# Altium PCB PCB2.PcbDoc (part 1 of 2)
Units mil, origin at the board's own origin, x right, y up, seen from the top; angles counter-clockwise.
Board outline 3889 x 3936 mil, 2 copper layers (Top Layer, Bottom Layer); 71 components, 78 nets, 442 pads, 93 vias.
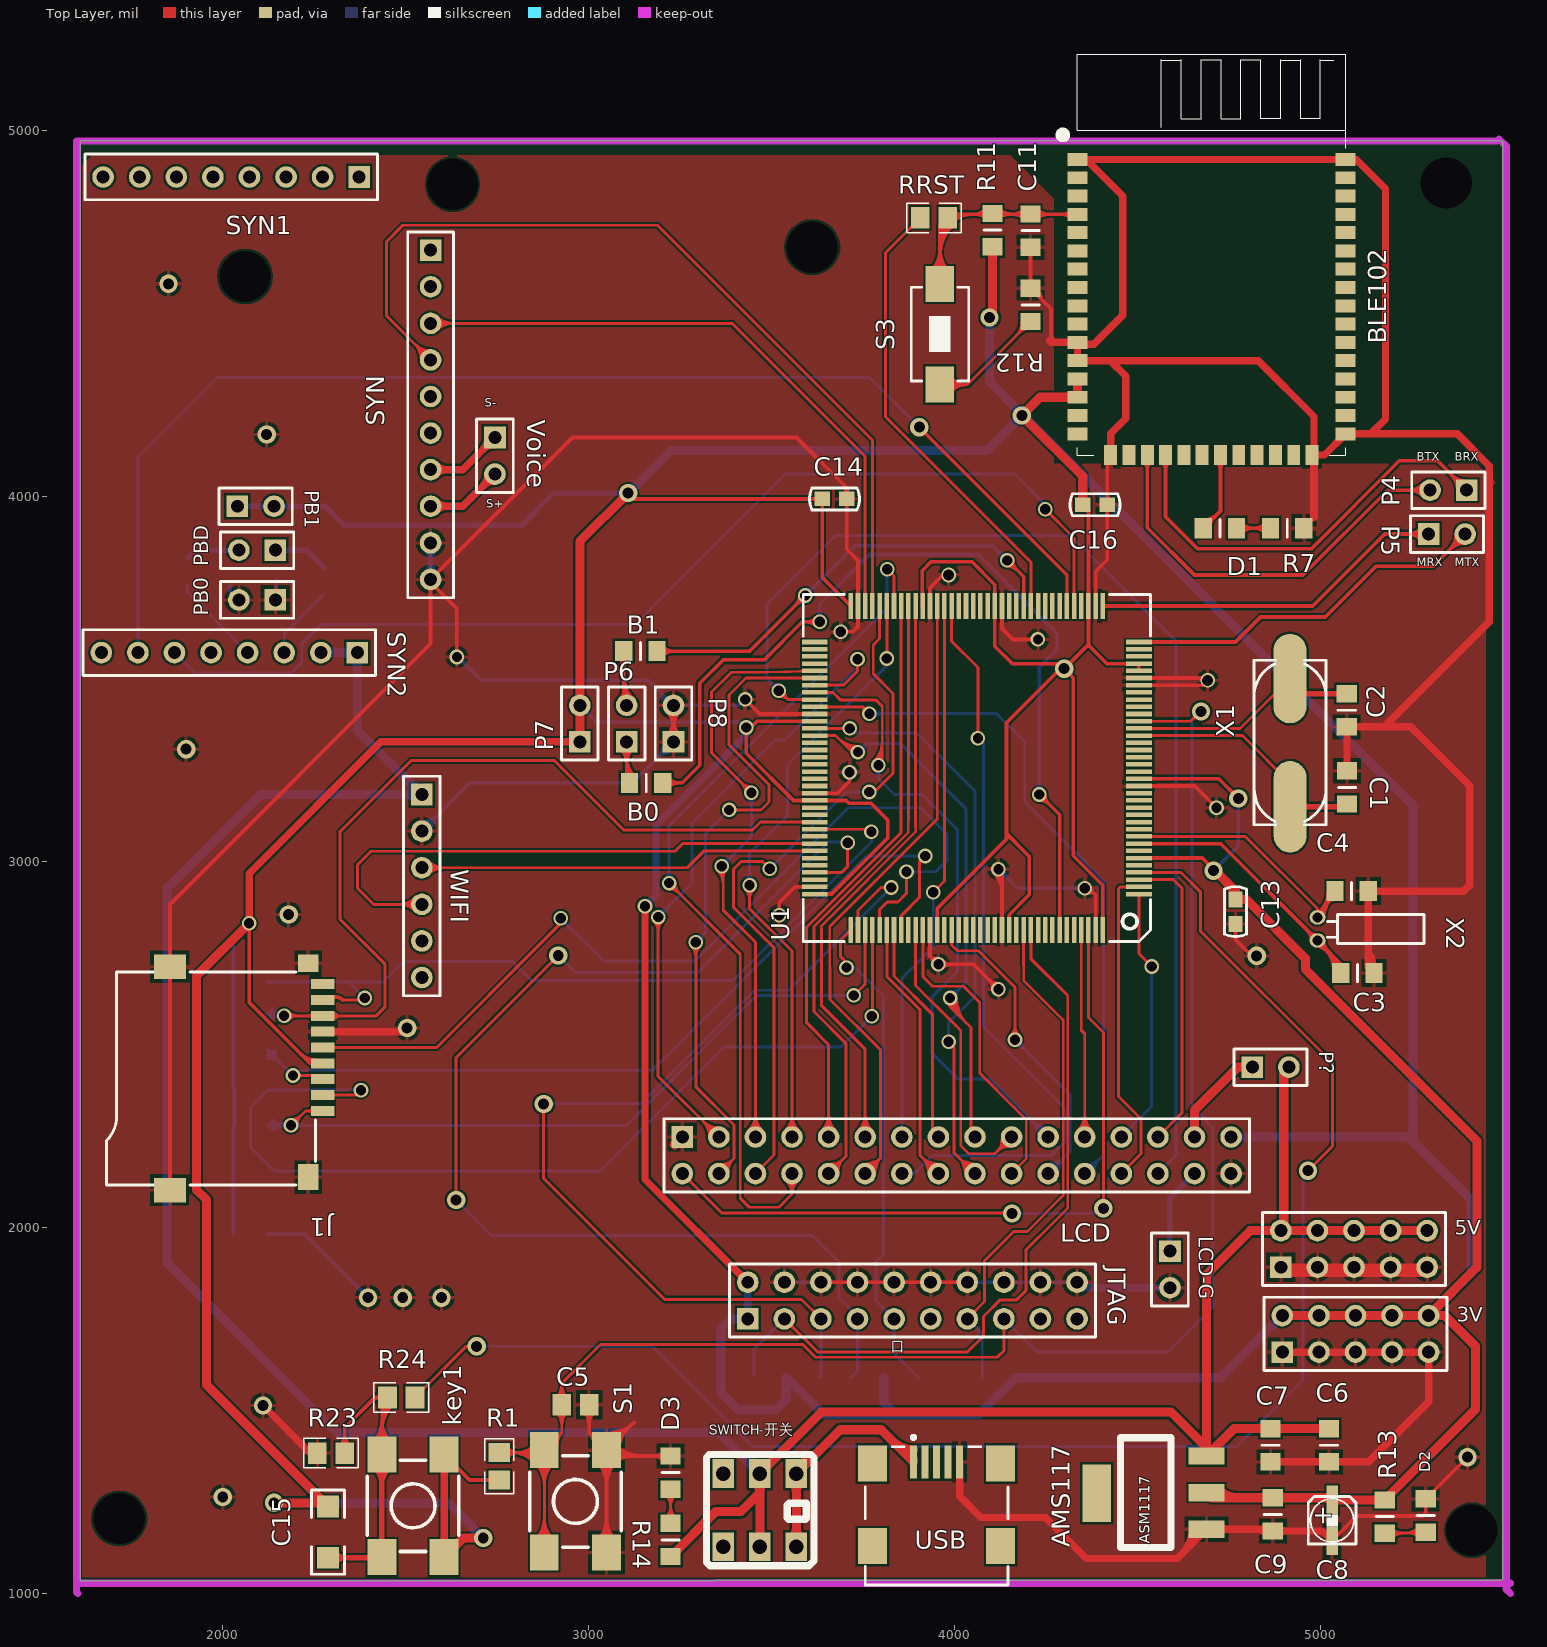
[diagram p0: Top Layer view]
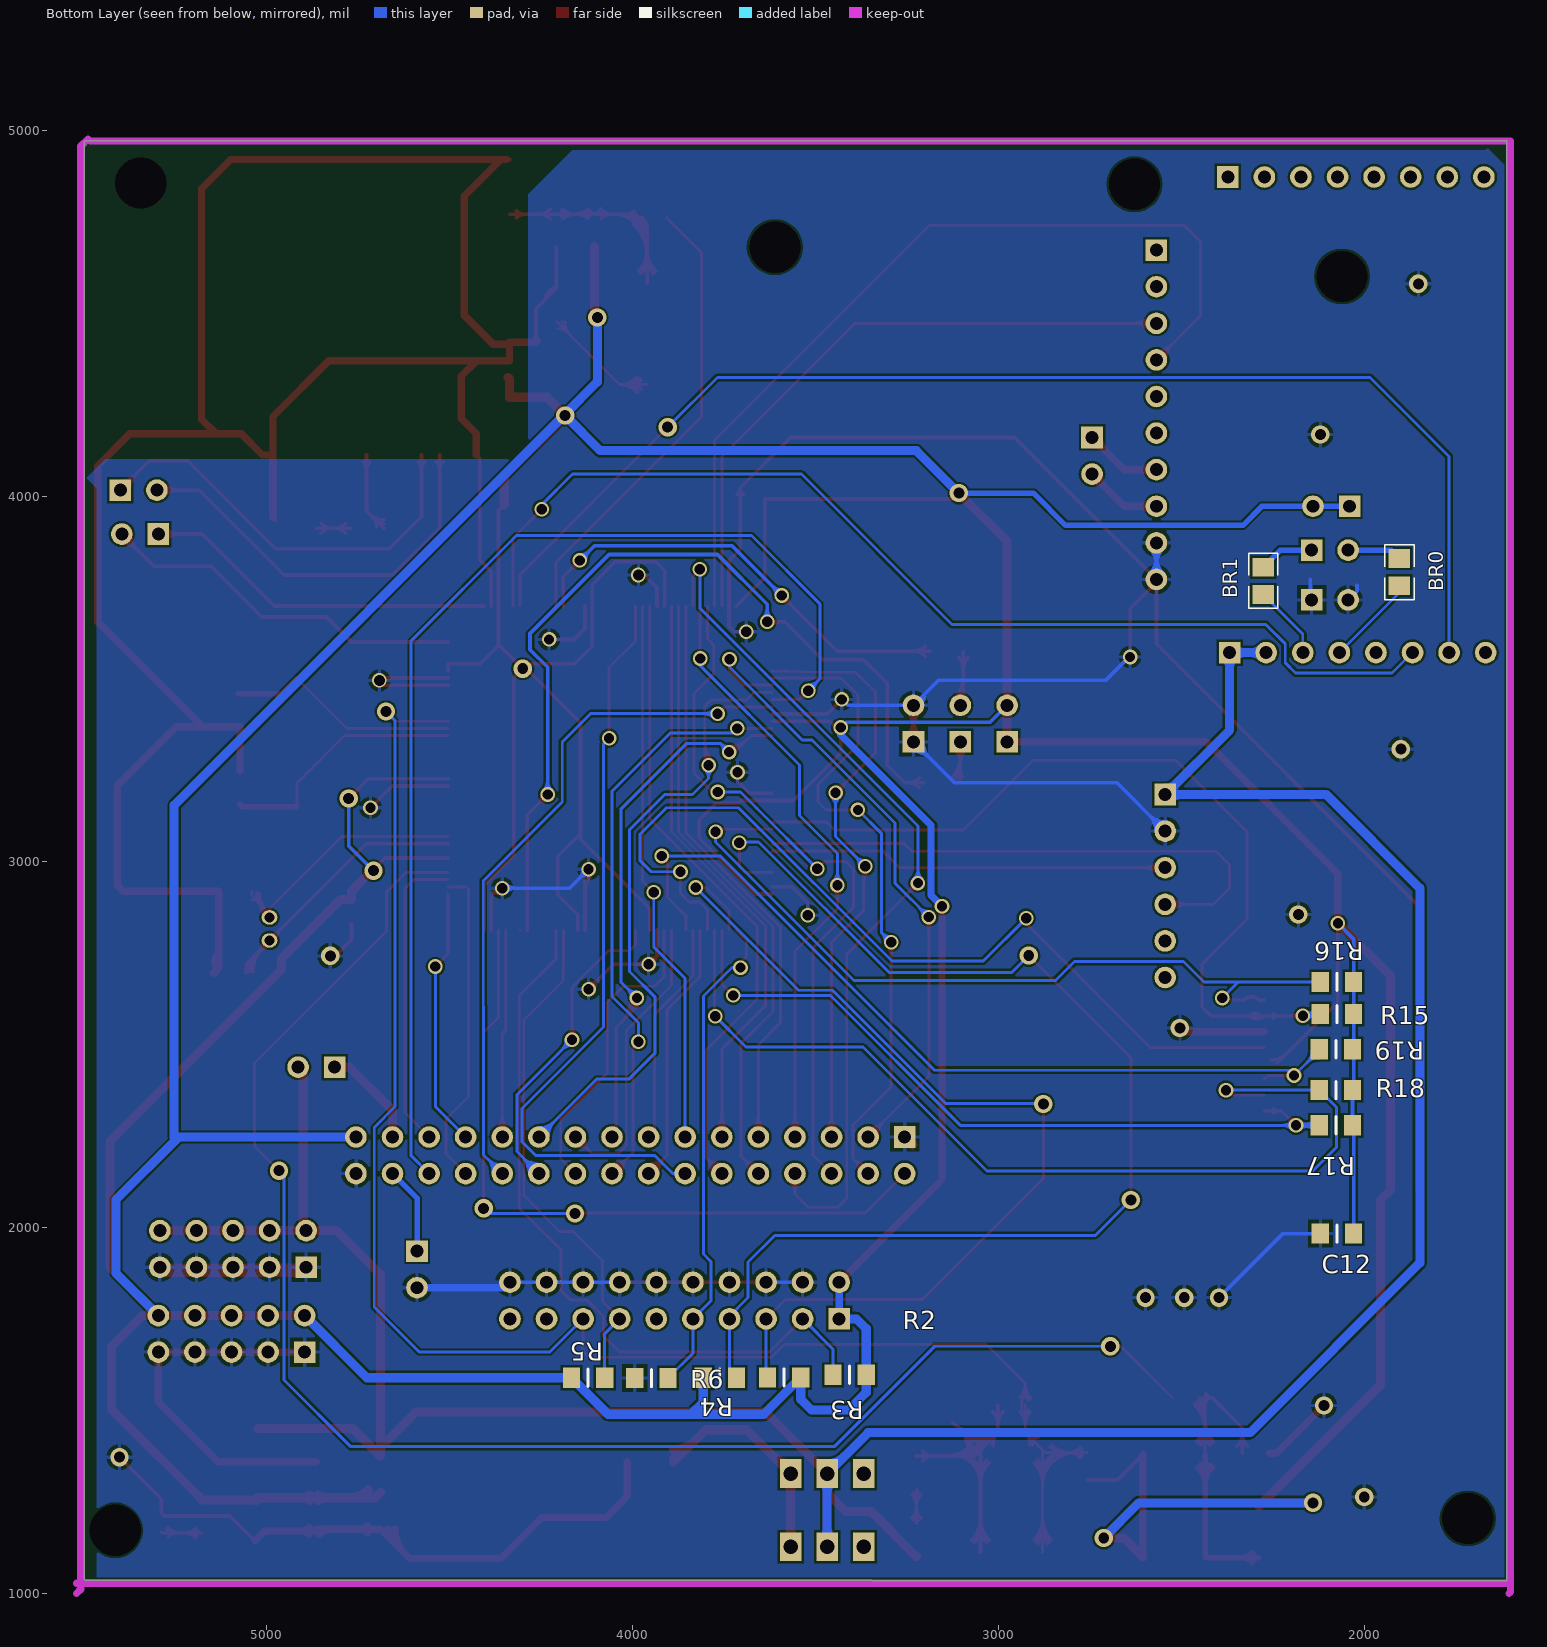
[diagram p1: Bottom Layer view, seen from below]

## Layer stack, top to bottom
Top Solder: solder mask 0.4, Solder Resist, Dk 3.5
Top Layer: signal copper 1.4
Dielectric 1: dielectric 12.6, FR-4, Dk 4.8
Bottom Layer: signal copper 1.4
Bottom Solder: solder mask 0.4, Solder Resist, Dk 3.5

## Board outline
3345,1036 3685,1036 5495,1036 5499,1040 5499,1251 5499,4968 5497.5,4969.5 5496,4971 5184,4971 1611,4971 1610,4970 1610,4885 1610,1035 1639,1035 3345,1035

## Design rules (kind name [scope] priority, off if disabled: settings)
Clearance [All] p1: gap=6
PolygonConnect [All] p1: connectstyle=Relief reliefconductorwidth=10 reliefentries=4 polygonreliefangle="90 Angle" airgapwidth=10
RoutingVias [All] p1: holewidth=28 width=40 viastyle="Through Hole" minholewidth=28 minwidth=40 maxholewidth=28 maxwidth=50
SolderMaskExpansion [All] p1: expansion=4
Width 5VIN [InNet('5V_IN')] p1: maxlimit=30 minlimit=20 preferedwidth=25
Width 5V [InNet('5V')] p2: maxlimit=30 minlimit=25 preferedwidth=25
Width 3.3V [InNet('3.3V')] p3: maxlimit=25 minlimit=10 preferedwidth=20
Width Width_1 [InNet('GND')] p4: maxlimit=30 minlimit=10 preferedwidth=20
Width [All] p5: maxlimit=25 minlimit=7 preferedwidth=8
29 further rules are at their usual default settings.

## Components (designator, comment, footprint, x,y, rotation, side; value= is the part's Value field where it differs from the comment)
3V "Header 5X2" HDR5X2_A1 4896,1660 r0 top (schematic designator POWER2)
5V "Header 5X2" HDR5X2_A1 4892,1892 r0 top (schematic designator POWER1)
AMS117 "" ASM117稳压芯片 4689,1176 r90 top
B0 "10K" 0805-有丝印 3112,3216 r0 top
B1 "10K" 0805-有丝印 3096,3576 r0 top
BLE102 "" WH-BLE102-V1.1 4336,4112 r0 top
BR0 "1k" 0805-1 1904,3792 r90 bottom
BR1 "1k" 0805-1 2276,3768 r90 bottom
C1 "20P" 0805-有丝印 5073,3249 r270 top
C2 "20P" 0805-有丝印 5072,3369 r90 top
C3 "10P" 0805-有丝印 5056,2696 r0 top
C4 "10P" 0805-有丝印 5040,2920 r0 top
C5 "0.1UF" 0805-2 2964,1516 r0 top
C6 "104" 0805-有丝印 5024,1360 r90 top
C7 "104" 0805-有丝印 4864,1360 r90 top
C8 "10u/16v" SMD-EC-F3 5032,1256 r270 top
C9 "104" 0805-有丝印 4870,1171 r90 top
C11 "100nF" 0805-有丝印 4208,4680 r90 top
C12 "0.1u" 0805-有丝印 2120,1984 r180 bottom
C13 "0.1u" C-RAD-0603 4768,2864 r270 top
C14 "0.1u" C-RAD-0603 3672,3992 r0 top
C15 "104" 1206 2288,1168 r90 top
C16 "Cap" C-RAD-0603 4384,3976 r0 top
D1 "" 贴片0805-有丝印 4680,3912 r0 top
D2 "" 贴片0805-有丝印 5288,1168 r90 top
D3 "" 贴片0805-有丝印 3224,1285.13 r90 top
J1 "SDCARD-M" SDCARD-M 1840,2408 r180 top
JTAG "Header 10X2" HDR10X2_A1 3435,1751 r0 top
key1 "SW-PB4" SW_PB4_A1 2520,1240 r90 top
LCD "Header 16X2" HDR16X2 3256,2248 r0 top
LCD-G "Header 2" HDR1X2 4589,1936 r270 top
P4 "Header 2" HDR1X2 5400,4016 r180 top
P5 "Header 2" HDR1X2 5296,3896 r0 top
P6 "Header 2" HDR1X2 3104,3328 r90 top
P7 "Header 2" HDR1X2 2976,3328 r90 top
P8 "Header 2" HDR1X2 3232,3328 r90 top
P? "Header 2" HDR1X2 4814,2439 r0 top
PB0 "Header 2" HDR1X2 2144,3716 r180 top
PB1 "Header 2" HDR1X2 2040,3972 r0 top
PBD "Header 2" HDR1X2 2144,3852 r180 top
R1 "10K" 0805-1 2756,1348 r270 top
R2 "10K" 0805-有丝印 3631,1591 r180 bottom
R3 "10K" 0805-有丝印 3452,1598 r180 bottom
R4 "10K" 0805-有丝印 3716,1590 r0 bottom
R5 "10K" 0805-有丝印 4076,1590 r0 bottom
R6 "10K" 0805-有丝印 3994,1589 r180 bottom
R7 "1K" 0805-有丝印 4864,3912 r0 top
R11 "RES" 0805-有丝印 4104,4772 r270 top
R12 "100R" 0805-有丝印 4208,4568 r270 top
R13 "3K" 0805-有丝印 5176,1256 r270 top
R14 "5K" 0805-有丝印 3224,1101.13 r90 top
R15 "10K" 0805-有丝印 2120,2584 r180 bottom
R16 "10K" 0805-有丝印 2120,2672 r180 bottom
R17 "10K" 0805-有丝印 2032,2280 r0 bottom
R18 "10K" 0805-有丝印 2032,2376 r0 bottom
R19 "10K" 0805-有丝印 2032,2488 r0 bottom
R23 "4.7k" 0805-1 2296,1384 r0 top
R24 "1k" 0805-1 2488,1536 r180 top
RRST "4.7k" 0805-1 3944,4760 r180 top
S1 "" SW_PB4_A1 2964,1252 r90 top
S3 "SW-PB" SW_PB2_A1 3960,4440 r0 top
SWITCH-开关 "" switch开关 3568,1328 r270 top
SYN "Header 10" DIP20 2568,4672 r0 top
SYN1 "Header 8" "DIP16 - duplicate1" 2373,4872 r270 top
SYN2 "Header 8" "DIP16 - duplicate1" 2368,3572 r270 top
U1 "STM32F103Z" STM32f103zet6 4504,2912 r90 top
USB "" USB2.0 3888,1360 r270 top
Voice "Header 2" HDR2X1_A 2744,4160 r270 top
WIFI "Header 6" HDR6X1_A 2544,3184 r270 top
X1 "8M" XTAL-Y贴片晶振 4917,3501 r90 top
X2 "32.768KHZ" CRYS-3X8 5000,2848 r180 top

## Footprints (in the part's own frame and the unit in brackets; to place one, negate y for a bottom-side part, rotate by r counter-clockwise, add the part's x,y. Pads: shape width x height; smd on the part's side, far side on the other; paste and mask are expansions set on the pad)
0805-1 [mm] "贴片带丝印"
  rect 1.3x1.5 smd: 1(-0.95,0) 2(0.95,0)
  silkscreen extent -1.91,-1.02 1.91,1.02, body extent -1.14,-0.51 1.14,0.51, height 1
0805-2 [mm] "贴片无丝印"
  rect 1.3x1.5 smd: 1(-0.95,0) 2(0.95,0)
0805-有丝印 [mm]
  rect 1.2x1.4 smd: 1(0,0) 2(2.308,0)
  silkscreen extent 1.15,-0.6 1.15,0.6, body extent 0.08,-0.7 2.23,0.7, height 0.7
1206 [mil] "贴片元件"
  rect 60x60 smd: 1(-70,0) 2(70,0)
  silkscreen extent -115,-45 115,45, body extent -75,-35 75,35, height 39
ASM117稳压芯片 [mm]
  rect 1.2x2.5 smd: 1(0,0) 2(2.54,0) 3(5.08,0)
  rect 4x2 smd: 4(2.5,7.62)
  silkscreen extent -1.27,2.46 6.35,5.97
C-RAD-0603 [mm] "贴片电容"
  rect 1.1x1 smd: 1(-0.85,0) 2(0.85,0)
  silkscreen extent -1.73,-0.76 1.73,0.76, body extent -1.14,-0.38 1.14,0.38, height 1
CRYS-3X8 [mm]
  oval 1.1x1 hole 0.7: 1(0.199,-0.003) 2(0.199,1.597)
  silkscreen extent -7.2,-0.2 -0.5,1.8
"DIP16 - duplicate1" [mm]
  rect 1.5x1.5 hole 0.9: 1(0,0)
  round 1.5 hole 0.9: 2(0,-2.54) 3(0,-5.08) 4(0,-7.62) 5(0,-10.16) 6(0,-12.7) 7(0,-15.24) 8(0,-17.78)
  silkscreen extent -1.59,-19.05 1.59,1.27
DIP20 [mm]
  rect 1.5x1.5 hole 0.9: 1(0,0)
  round 1.5 hole 0.9: 2(0,-2.54) 3(0,-5.08) 4(0,-7.62) 5(0,-10.16) 6(0,-12.7) 7(0,-15.24) 8(0,-17.78) 9(0,-20.32) 10(0,-22.86)
  silkscreen extent -1.59,-24.13 1.59,1.27
HDR1X2 [mm] "Connector; Header; 2 Position"
  rect 1.5x1.5 hole 0.9: 1(0,0)
  round 1.5 hole 0.9: 2(2.54,0)
  silkscreen extent -1.27,-1.27 3.81,1.27
HDR2X1_A [mm] "Connector; Header; 2 Position"
  rect 1.5x1.5 hole 0.9: 1(0,0)
  round 1.5 hole 0.9: 2(2.54,0)
  silkscreen extent -1.27,-1.27 3.81,1.27
HDR5X2_A1 [mm] "Connector; Header; 5x2 Position"
  rect 1.5x1.5 hole 0.9: 1(0,0)
  round 1.5 hole 0.9: 2(0,2.54) 3(2.54,0) 4(2.54,2.54) 5(5.08,0) 6(5.08,2.54) 7(7.62,0) 8(7.62,2.54) 9(10.16,0) 10(10.16,2.54)
  silkscreen extent -1.27,-1.27 11.43,3.81
HDR6X1_A [mm] "Connector; Header; 4 Position"
  rect 1.5x1.5 hole 0.9: 1(0,0)
  round 1.5 hole 0.9: 2(2.54,0) 3(5.08,0) 4(7.62,0) 5(10.16,0) 6(12.7,0)
  silkscreen extent -1.27,-1.27 13.97,1.27
HDR10X2_A1 [mm] "Connector; Header; 10x2 Position"
  rect 1.5x1.5 hole 0.9: 1(0,0)
  round 1.5 hole 0.9: 2(0,2.54) 3(2.54,0) 4(2.54,2.54) 5(5.08,0) 6(5.08,2.54) 7(7.62,0) 8(7.62,2.54) 9(10.16,0) 10(10.16,2.54) 11(12.7,0) 12(12.7,2.54) 13(15.24,0) 14(15.24,2.54) 15(17.78,0) 16(17.78,2.54) 17(20.32,0) 18(20.32,2.54) 19(22.86,0) 20(22.86,2.54)
  silkscreen extent -1.27,-1.27 24.13,3.81
HDR16X2 [mm] "Connector; Header; 16x2 Position"
  rect 1.5x1.5 hole 0.9: 1(0,0)
  round 1.5 hole 0.9: 2(0,-2.54) 3(2.54,0) 4(2.54,-2.54) 5(5.08,0) 6(5.08,-2.54) 7(7.62,0) 8(7.62,-2.54) 9(10.16,0) 10(10.16,-2.54) 11(12.7,0) 12(12.7,-2.54) 13(15.24,0) 14(15.24,-2.54) 15(17.78,0) 16(17.78,-2.54) 17(20.32,0) 18(20.32,-2.54) 19(22.86,0) 20(22.86,-2.54) 21(25.4,0) 22(25.4,-2.54) 23(27.94,0) 24(27.94,-2.54) 25(30.48,0) 26(30.48,-2.54) 27(33.02,0) 28(33.02,-2.54) 29(35.56,0) 30(35.56,-2.54) 31(38.1,0) 32(38.1,-2.54)
  silkscreen extent -1.27,-3.81 39.37,1.27
SDCARD-M [mm] "TF卡"
  rect 1.6x0.7 smd: 1(-11.008,2.25) 2(-11.008,1.15) 3(-11.008,0.05) 4(-11.008,-1.05) 5(-11.008,-2.15) 6(-11.008,-3.25) 7(-11.008,-4.35) 8(-11.008,-5.45) 9(-11.008,-6.55)
  rect 1.4x1.2 smd: 10(-10,-8.004)
  rect 2.2x1.7 smd: 11(-0.4,-7.75) 13(-0.4,7.75)
  rect 1.4x1.8 smd: 12(-10,6.85)
  silkscreen extent -10.5,-7.4 4,7.4
SMD-EC-F3 [mm]
  rect 2x0.8 smd: 1(0,0) 2(2.835,0)
  silkscreen extent -0.23,-1.65 3.07,1.65
STM32f103zet6 [mm]
  rect 0.318x1.8 smd: 1(0,0) 2(0.5,0) 3(1,0) 4(1.5,0) 5(2,0) 6(2.5,0) 7(3,0) 8(3.5,0) 9(4,0) 10(4.5,0) 11(5,0) 12(5.5,0) 13(6,0) 14(6.5,0) 15(7,0) 16(7.5,0) 17(8,0) 18(8.5,0) 19(9,0) 20(9.5,0) 21(10,0) 22(10.5,0) 23(11,0) 24(11.5,0) 25(12,0) 26(12.5,0) 27(13,0) 28(13.5,0) 29(14,0) 30(14.5,0) 31(15,0) 32(15.5,0) 33(16,0) 34(16.5,0) 35(17,0) 36(17.5,0) 73(17.5,22.5) 74(17,22.5) 75(16.5,22.5) 76(16,22.5) 77(15.5,22.5) 78(15,22.5) 79(14.5,22.5) 80(14,22.5) 81(13.5,22.5) 82(13,22.5) 83(12.5,22.5) 84(12,22.5) 85(11.5,22.5) 86(11,22.5) 87(10.5,22.5) 88(10,22.5) 89(9.5,22.5) 90(9,22.5) 91(8.5,22.5) 92(8,22.5) 93(7.5,22.5) 94(7,22.5) 95(6.5,22.5) 96(6,22.5) 97(5.5,22.5) 98(5,22.5) 99(4.5,22.5) 100(4,22.5) 101(3.5,22.5) 102(3,22.5) 103(2.5,22.5) 104(2,22.5) 105(1.5,22.5) 106(1,22.5) 107(0.5,22.5) 108(0,22.5)
  rect 1.8x0.318 smd: 37(20,2.5) 38(20,3) 39(20,3.5) 40(20,4) 41(20,4.5) 42(20,5) 43(20,5.5) 44(20,6) 45(20,6.5) 46(20,7) 47(20,7.5) 48(20,8) 49(20,8.5) 50(20,9) 51(20,9.5) 52(20,10) 53(20,10.5) 54(20,11) 55(20,11.5) 56(20,12) 57(20,12.5) 58(20,13) 59(20,13.5) 60(20,14) 61(20,14.5) 62(20,15) 63(20,15.5) 64(20,16) 65(20,16.5) 66(20,17) 67(20,17.5) 68(20,18) 69(20,18.5) 70(20,19) 71(20,19.5) 72(20,20) 109(-2.5,20) 110(-2.5,19.5) 111(-2.5,19) 112(-2.5,18.5) 113(-2.5,18) 114(-2.5,17.5) 115(-2.5,17) 116(-2.5,16.5) 117(-2.5,16) 118(-2.5,15.5) 119(-2.5,15) 120(-2.5,14.5) 121(-2.5,14) 122(-2.5,13.5) 123(-2.5,13) 124(-2.5,12.5) 125(-2.5,12) 126(-2.5,11.5) 127(-2.5,11) 128(-2.5,10.5) 129(-2.5,10) 130(-2.5,9.5) 131(-2.5,9) 132(-2.5,8.5) 133(-2.5,8) 134(-2.5,7.5) 135(-2.5,7) 136(-2.5,6.5) 137(-2.5,6) 138(-2.5,5.5) 139(-2.5,5) 140(-2.5,4.5) 141(-2.5,4) 142(-2.5,3.5) 143(-2.5,3) 144(-2.5,2.5)
  silkscreen extent -3.3,-0.8 20.8,23.3
SW_PB2_A1 [mm]
  rect 2x2.5 smd: 1(0,3.556) 2(0,-3.444)
  silkscreen extent -2,-3.19 2,3.31, body extent -2.03,-3.17 2.03,3.3, height 1.2
SW_PB4_A1 [mil]
  rect 98.42x78.74 smd: 1(-140,85) 2(-140,-85) 3(140,-85) 4(140,85)
  silkscreen extent -125,-125 125,125, body extent -125,-125 125,125, height 236
switch开关 [mm]
  rect 2x1.5 hole 1: 1(0,0) 2(0,-2.54) 3(0,-5.08) 4(5.08,-5.08) 5(5.08,-2.54) 6(5.08,0)
  silkscreen extent -1.32,-6.25 6.4,1.22
USB2.0 [mm]
  rect 2.3x0.5 smd: 1(0,0) 2(0,0.8) 3(0,1.6) 4(0,2.4) 5(0,3.2)
  rect 2.5x2 smd: 6(0.1,6.05) 7(5.854,6.05) 8(0.1,-2.85) 9(5.854,-2.85)
  silkscreen extent -1.82,-3.35 8.55,6.55
WH-BLE102-V1.1 [mm]
  rect 1.4x0.9 smd: 1(0,20.52) 2(0,19.25) 3(0,17.98) 4(0,16.71) 5(0,15.44) 6(0,14.17) 7(0,12.9) 8(0,11.63) 9(0,10.36) 10(0,9.09) 11(0,7.82) 12(0,6.55) 13(0,5.28) 14(0,4.01) 15(0,2.74) 16(0,1.47) 29(18.62,1.47) 30(18.62,2.74) 31(18.62,4.01) 32(18.62,5.28) 33(18.62,6.55) 34(18.62,7.82) 35(18.62,9.09) 36(18.62,10.36) 37(18.62,11.63) 38(18.62,12.9) 39(18.62,14.17) 40(18.62,15.44) 41(18.62,16.71) 42(18.62,17.98) 43(18.62,19.25) 44(18.62,20.52)
  rect 0.9x1.4 smd: 17(2.31,0) 18(3.58,0) 19(4.85,0) 20(6.12,0) 21(7.39,0) 22(8.66,0) 23(9.93,0) 24(11.2,0) 25(12.47,0) 26(13.74,0) 27(15.02,0) 28(16.29,0)
  silkscreen extent -1.27,0 18.62,27.81
XTAL-Y贴片晶振 [mil]
  oval 245x90 smd: 1(0,0)
  oval 250x90 smd: 2(-350.39,-0.34)
  silkscreen extent -400,-99 50,98
贴片0805-有丝印 [mm]
  rect 1.2x1.4 smd: 1(0,0) 2(2.308,0)
  silkscreen extent 1.15,-0.6 1.15,0.6, body extent 0.08,-0.7 2.23,0.7, height 0.7

## Part data
3V 5V LCD P4 P5 P6 P7 P8 Voice WIFI: "接插件"
AMS117: library part AMS117
B0 B1 R2 R3 R4 R5 R6 R7 R12 R13 R14 R15 R16 R17 R18 R19: library part RES
BLE102: library part WH-BLE102-V1.1
BR0 BR1 R1 R23 R24 RRST: library part Res1, "贴片电阻"
C1 C2 C3 C4 C6 C7 C9 C11 C12: library part CAP
C5 C13 C14 C15: library part Cap, "无极性电容"
C8: library part CAP-电解电容
C16: "无极性电容"
D1 D2 D3: library part LED
J1: "TF卡槽"
JTAG SYN: "Header, 10-Pin"
key1 S3: "微动开关"
LCD-G P? PB0 PB1 PBD: "Header, 2-Pin"
S1: library part SW-PB4, "微动开关"
SWITCH-开关: library part SWITCH-开关
SYN1 SYN2: "Header, 8-Pin"
U1: "STM32单片机144引脚"
USB: library part USB
X1 X2: library part XTAL-Y-晶振

## Via types
v1: diameter 40, hole 28, Top Layer to Bottom Layer, 56 vias
v2: diameter 50/50 (per signal layer), hole 30, Top Layer to Bottom Layer, 29 vias
v3: diameter 50/50 (per signal layer), hole 139.76, Top Layer to Bottom Layer, 6 vias
v4: diameter 40/40 (per signal layer), hole 30, Top Layer to Bottom Layer, 2 vias

## Nets (pads, with @x,y where several pads share a name; then routed paths per layer and width w, separated by ;. In a path a pad name is that pad's centre, name@x,y a point inside that pad or via, vN(x,y) a via of type N, cw(c..) or ccw(c..) an arc to the next point about the centre after c; other vN are vias at no path point)
3.3V: 3V.2 3V.4 3V.6 3V.8 3V.10 AMS117.2 BLE102.13 BLE102.14 C8.1 C9.2 C12.2 C13.1 C14.1 C15.2 C16.1 J1.4 JTAG.1 JTAG.2 key1.2 key1.3 LCD.31 P7.1 P7.2 PB1.1 PB1.2 R1.2 R2.2 R3.2 R4.2 R5.2 R11.2 R13.1 R15.2 R16.2 R17.1 R18.1 R19.1 U1.6 U1.17 U1.32 U1.33 U1.39 U1.52 U1.62 U1.72 U1.84 U1.95 U1.108 U1.121 U1.131 U1.144 | length 27114.8
  Top Layer w10: v1(2072,2832) 2072,2616 2238.66,2449.34 ; 2211.65,2476.35 ccw(c2255.67,2520.37) J1.4@2255.67,2458.12 ; key1.3@2605,1380 2674.4,1310.6 R1.2@2756,1310.6 ; v2(3108,4008) 3124,3992 C14.1@3638.54,3992 3638.54,3777.46 U1.72@3716.6,3699.4 ; v1(3431,3367.1) 3431,3297 3560.1,3167.9 U1.95@3618.17,3167.9 3704,3167.9 3711.9,3160 3772,3160 3818,3114 3818,3066 3664,2912 U1.108@3618.17,2912 ; v1@3440,3364 3460.44,3384.44 U1.84@3618.17,3384.44 ; U1.62@3913.45,3699.4 3912,3700.85 3912,3796 3936,3820 4048,3820 4110.3,3757.7 U1.52@4110.3,3699.4 4110.3,3589.7 4158.08,3541.92 v2@4295.04,3541.92 ; U1.121@3952.82,2813.58 3952.82,2872.82 4142,3062 4142,3077.34 ; U1.131@4149.67,2813.58 4149.67,2855.57 4204,2909.9 4204,3015.34 4142,3077.34 ; v2@4308.96,3536.96 4366.2,3594.2 ; C16.1@4350.54,3976 4366.2,3960.33 U1.39@4366.2,3699.4 4366.2,3594.2 ; U1.144@4405.57,2813.57 4405.57,2936 4324.79,3016.79 4324.79,3503.21 v2(4300,3528) 4295.04,3532.96 4142,3379.92 4142,3077.34 ; U1.6@4504,3010.43 4677.57,3010.43 v2@4710,2978 ; U1.17@4504,3226.96 4722.04,3226.96 v2(4776,3173) ; U1.32@4504,3522.24 U1.33@4504,3541.92 4416,3541.92 4366.2,3591.72 4366.2,3594.2
  Top Layer w20: v1(2072,2832) 2072,2968 2432,3328 P7.1@2976,3328 ; key1.2@2605,1100 key1.3@2605,1380 ; v1(3154,2879) 3154,2132 JTAG.2@3435,1851
  Top Layer w25: v1(2072,2832) 1928,2688 1928,2104 1956,2076 1956,1570 C15.2@2278,1248 ; v2(2140,1248) C15.2@2278,1248 ; C15.2@2288,1238 C15.2@2278,1248 ; key1.2@2605,1100 2657,1152 v2(2712,1152) ; P7.1@2976,3328 P7.2@2976,3428 2976,3876 v2(3108,4008) ; v2(4096,4488) 4104,4496 R11.2@4104,4681.13 ; BLE102.13@4340.13,4324 BLE102.13@4336,4319.87 BLE102.14@4336,4269.87 4233.87,4269.87 v2(4184,4220) 4350.54,4053.46 C16.1@4350.54,3976 ; AMS117.2@4689,1276 4703.13,1261.87 C9.2@4870,1261.87 5026.13,1261.87 C8.1@5032,1256 R13.1@5176,1256 5424,1504 5424,1676 5340,1760 3V.10@5296,1760 ; v2@4710,2978 4768,2920 C13.1@4768,2897.46 4797.54,2897.46 4959,2736 4959,2706.46 5428,2237.46 5428,1892 3V.10@5296,1760 ; AMS117.2@4722.46,1283.86 ccw(c4775.56,1336.97) 4775.56,1261.87 ; 3V.2@4896,1760 3V.4@4996,1760 3V.6@5096,1760 3V.8@5196,1760 3V.10@5296,1760 ; 4839.21,1261.87 cw(c4839.21,1235.02) 4858.2,1254 ccw(c4839.21,1235.02) 4839.21,1261.87 ; 4839.21,1261.87 ccw(c4839.21,1288.72) 4858.2,1269.73 cw(c4839.21,1288.72) 4839.21,1261.87 ; 4900.79,1261.87 cw(c4900.79,1288.72) 4881.8,1269.73 ccw(c4900.79,1288.72) 4900.79,1261.87 ; 4900.79,1261.87 ccw(c4900.79,1235.02) 4881.8,1254 cw(c4900.79,1235.02) 4900.79,1261.87 ; 5010,1261.87 cw(c5010,1234) 5029.7,1253.7 ccw(c5010,1234) 5010,1261.87
  Bottom Layer w10: C12.2@2029.13,1984 2029.13,2277.13 R17.1@2032,2280 R18.1@2032,2376 2029.13,2378.87 R15.2@2029.13,2584 R16.2@2029.13,2672 2029.13,2789.13 v1(2072,2832) ; P7.2@2976,3428 3022,3382 3416.1,3382 ; v2(4708,2976) 4776,3044 v2(4776,3173)
  Bottom Layer w15: PB1.1@2036,3972 PB1.1@2040,3972 PB1.2@2140,3972 2280,3972 2332,3920 2816,3920 2904,4008 v2(3108,4008)
  Bottom Layer w20: v1(3154,2879) 3184,2909 3184,3100 3431,3347 v1(3431,3367.1) ; JTAG.1@3435,1751 JTAG.2@3435,1851
  Bottom Layer w25: v2(2140,1248) 2616,1248 v2(2712,1152) ; v2(3108,4008) 3224,4124 4088,4124 v2(4184,4220) v2@4186,4222 ; JTAG.1@3435,1751 3388,1751 3361.13,1724.13 R3.2@3361.13,1598 3361.13,1549.87 3409,1502 3511,1502 3540.13,1531.13 R2.2@3540.13,1591 3641.13,1490 3840,1490 ; R4.2@3806.87,1590 3806.87,1523.13 3840,1490 ; v2(4096,4488) 4096,4312 v2@4186,4222 ; LCD.31@4756,2248 5240,2248 ; 3V.2@4896,1760 4726,1590 R5.2@4166.87,1590 4066.87,1490 3840,1490 ; 3V.10@5296,1760 5412,1876 5412,2076 5240,2248 ; v2@4186,4222 5252.97,3155.03 5252.97,2248 5240,2248
5V: 5V.2 5V.4 5V.6 5V.8 5V.10 AMS117.3 C6.2 C7.2 P?.2 R14.1 SWITCH-开关.2 SWITCH-开关.5 SYN2.1 SYN2.2 WIFI.1 | length 8836.5
  Top Layer w25: R14.1@3224,1101.13 3346.87,1224 3416,1224 3468,1276 ; SWITCH-开关.2@3455.96,1306.12 cw(c3426.89,1277.05) 3468,1277.05 cw(c3509.11,1277.05) 3480.04,1306.12 SWITCH-开关.2@3480.04,1306 ; SWITCH-开关.5@3468,1128 3468,1276 ; P?.2@4914,2439 4900,2425 5V.2@4900,1992 ; C6.2@5024,1450.87 C7.2@4864,1450.87 4763.87,1450.87 AMS117.3@4689,1376 AMS117.3@4689,1399 ; 5V.10@5292,1976 5V.10@5300,1976 ; 5V.10@5292,1992 5V.8@5192,1992 5V.6@5092,1992 5V.4@4992,1992 5V.2@4900,1992 ; 3468,1276 SWITCH-开关.2@3468,1328 3636,1496 4592,1496 AMS117.3@4689,1399 ; AMS117.3@4689,1399 4689,1873 4808,1992 5V.2@4892,1992 5V.2@4900,1992
  Bottom Layer w25: SYN2.2@2268,3572 SYN2.1@2368,3572 2368,3360 WIFI.1@2544,3184 2104,3184 1848,2928 1848,1904 2312,1440 3356,1440 SWITCH-开关.2@3468,1328 SWITCH-开关.5@3468,1128 ; SYN2.2@2280.04,3559.96 cw(c2309.11,3530.89) 2309.11,3572 cw(c2309.11,3613.11) SYN2.2@2280.04,3584.04 ; SYN2.1@2355.96,3584.04 cw(c2326.89,3613.11) 2326.89,3572 cw(c2326.89,3530.89) 2355.96,3559.96 cw(c2326.89,3530.89) 2368,3530.89 cw(c2409.11,3530.89) SYN2.1@2380.04,3559.96 ; WIFI.1@2526.97,3184 ccw(c2485.86,3184) 2514.93,3213.07 ccw(c2544,3242.14) WIFI.1@2544,3201.03 ; WIFI.1@2531.96,3171.96 ccw(c2502.89,3142.89) 2502.89,3184 ccw(c2502.89,3225.11) WIFI.1@2531.96,3196.04 ; 3422.13,1373.87 ccw(c3468,1419.74) SWITCH-开关.2@3468,1354.87 ; SWITCH-开关.5@3455.96,1149.88 ccw(c3426.89,1178.95) 3468,1178.95 ccw(c3509.11,1178.95) SWITCH-开关.5@3480.04,1149.88 ; SWITCH-开关.2@3455.96,1306.12 cw(c3426.89,1277.05) 3468,1277.05 cw(c3509.11,1277.05) SWITCH-开关.2@3480.04,1306.12
5V_IN: SWITCH-开关.1 SWITCH-开关.6 USB.1 | length 863.1
  Top Layer w25: SWITCH-开关.6@3555.96,1149.88 ccw(c3526.89,1178.95) 3568,1178.95 ccw(c3609.11,1178.95) SWITCH-开关.6@3580.04,1149.88 ; SWITCH-开关.1@3555.96,1306.12 cw(c3526.89,1277.05) 3568,1277.05 cw(c3609.11,1277.05) SWITCH-开关.1@3580.04,1306.12 ; SWITCH-开关.6@3568,1128 SWITCH-开关.1@3568,1328 3688,1448 3800,1448 USB.1@3888,1360 ; SWITCH-开关.1@3568,1354.87 ccw(c3568,1419.74) 3613.87,1373.87 ; 3832.05,1415.95 ccw(c3888,1471.9) USB.1@3888,1392.78 ; 3874.73,1373.27 ccw(c3888,1386.55) USB.1@3888,1367.78
BK: LCD.28 U1.81 | length 3262
  Top Layer w8: v1(3520,3468) 3544.5,3443.5 ; v1@3521.27,3452.05 cw(c3523.63,3422.62) 3544.5,3443.5 ; v1@3535.95,3466.73 ccw(c3565.38,3464.37) 3544.5,3443.5 ; U1.81@3618.17,3443.5 3544.5,3443.5
  Bottom Layer w8: v1@3504,3468 ccw(c3465.37,3468) 3492.69,3495.31 ccw(c3520,3522.63) v1@3520,3484 ; v1(3520,3468) 3487,3501 3487,3704 3675,3892 4317,3892 4606,3603 4606,2198 LCD.28@4556,2148
BOOT0: B0.2 U1.138 | length 2739.2
  Top Layer w10: B0.2@3202.87,3216 3256,3216 3304,3264 3304,3488 3368,3552 3480,3552 3584,3656 v1@3624,3656 ; B0.2@3216.03,3202.83 cw(c3247.82,3171.04) 3247.82,3216 cw(c3247.82,3260.96) B0.2@3216.03,3229.17 ; v1@3621.39,3645.39 ccw(c3595.79,3619.79) 3595.79,3656 ccw(c3595.79,3692.21) v1@3621.39,3666.61 ; v1@4224,3192 v1(4232,3184) 4287.46,3128.54 U1.138@4287.46,2813.58 ; v1@4232,3169 cw(c4232,3132.79) 4257.61,3158.39 cw(c4283.21,3184) v1@4247,3184
  Bottom Layer w10: v1@3621.39,3666.61 ccw(c3595.79,3692.21) 3632,3692.21 ccw(c3668.21,3692.21) v1@3642.61,3666.61 ; v1(3632,3656) 3632,3704 3768,3840 4064,3840 4280,3624 4280,3580 4232,3532 v1(4232,3184) ; v1@4221.39,3194.61 ccw(c4195.79,3220.21) 4232,3220.21 ccw(c4268.21,3220.21) v1@4242.61,3194.61
BOOT1: B1.2 U1.48 | length 1534.4
  Top Layer w10: B1.2@3186.87,3576 3440,3576 v1(3592,3728) ; B1.2@3200.03,3562.83 cw(c3231.82,3531.04) 3231.82,3576 cw(c3231.82,3620.96) B1.2@3200.03,3589.17 ; v1@3577,3728 cw(c3540.79,3728) 3566.39,3702.39 cw(c3592,3676.79) v1@3592,3713 ; v1@4144,3809 cw(c4144,3772.79) 4169.61,3798.39 cw(c4195.21,3824) v1@4159,3824 ; v1(4144,3824) 4189.04,3778.96 U1.48@4189.04,3699.4
  Bottom Layer w10: v1(3592,3728) 3728,3864 4104,3864 v1(4144,3824) ; v1@3592,3743 ccw(c3592,3779.21) 3617.61,3753.61 ccw(c3643.21,3728) v1@3607,3728 ; v1@4129,3824 ccw(c4092.79,3824) 4118.39,3849.61 ccw(c4144,3875.21) v1@4144,3839
GND: 3V.1 3V.3 3V.5 3V.7 3V.9 5V.1 5V.3 5V.5 5V.7 5V.9 AMS117.1 BLE102.1 BLE102.11 BLE102.12 BLE102.17 BLE102.28 BLE102.29 BLE102.44 C1.1 C2.1 C3.2 C4.2 C5.2 C6.1 C7.1 C8.2 C9.1 C11.1 C12.1 C13.2 C14.2 C16.2 D2.2 D3.2 J1.6 J1.10 J1.11 J1.12 J1.13 JTAG.4 JTAG.6 JTAG.8 JTAG.10 JTAG.12 JTAG.14 JTAG.16 JTAG.18 JTAG.20 LCD-G.2 LCD.1 LCD.32 P8.1 P8.2 PB0.1 PB0.2 R6.1 R7.2 R12.1 R23.1 S1.2 S1.3 SYN.9 SYN.10 U1.16 U1.30 U1.31 U1.38 U1.51 U1.61 U1.71 U1.83 U1.94 U1.107 U1.120 U1.130 U1.143 USB.5 WIFI.2 | length 28110.9
  Top Layer w10: J1.13@1855.75,2102.88 J1.11@1855.75,2713.12 1855.75,2883.75 2568,3596 SYN.10@2568,3764 ; v1(2640,3560) 2640,3692 SYN.10@2568,3764 ; C5.2@3001.4,1516 3001.4,1439.6 ; S1.3@3034.04,1406.39 cw(c3084.65,1391.01) 3070.96,1442.1 ; S1.3@3043.61,1403.48 cw(c3104.94,1384.85) 3088.35,1446.76 ; S1.2@3049,1112 S1.3@3049,1392 ; S1.3@3049.52,1396.24 ccw(c3045.1,1443.88) 3091.32,1431.5 ; S1.3@3050.44,1386.28 ccw(c3046.51,1428.63) S1.3@3087.6,1417.62 ; S1.3@3053.18,1400.57 cw(c3125.23,1378.68) 3105.74,1451.42 ; S1.3@3053.31,1401.13 cw(c3095.9,1394.09) S1.3@3084.73,1435.79 ; D3.2@3224,1376 3065,1376 S1.3@3049,1392 ; 3225.48,2225.65 cw(c3262.61,2215.7) LCD.1@3254.9,2253.36 ; P8.1@3232,3328 P8.2@3232,3428 ; 3233.65,2217.48 ccw(c3223.7,2254.61) LCD.1@3261.36,2246.9 ; v1(3428,3444) 3467.87,3404.13 U1.83@3618.17,3404.13 ; v1(3521,2854) 3521,2889 3549.52,2917.52 ; 3536,2904 3564,2932 3617.86,2932 U1.107@3618.17,2931.69 ; U1.94@3618.17,3187.59 3680,3187.59 3713,3220.59 v1(3713,3245) ; JTAG.6@3635,1851 JTAG.8@3735,1851 JTAG.10@3835,1851 JTAG.12@3935,1851 JTAG.14@4035,1851 ; v1(3689,3629) 3722.28,3629 3736.28,3643 U1.71@3736.28,3699.4 3736.28,3823.72 3705.46,3854.54 C14.2@3705.46,3992 3705.46,4022.54 ; U1.120@3933.13,2813.58 3933.13,2742.87 ; U1.61@3933.13,3699.4 3933.13,3749.13 3964,3780 ; 3938.49,2735.44 ccw(c3965.45,2740.3) v1@3953.89,2715.47 ; 3940.56,2737.51 cw(c3935.7,2710.55) v1@3960.53,2722.11 ; 4102.03,2663.08 ccw(c4123.44,2668.82) v1@4119,2647.1 ; 4108.92,2669.97 cw(c4103.18,2648.56) v1@4124.9,2653 ; v1@4117.1,2965.28 cw(c4114.24,2950.81) 4127.02,2958.19 cw(c4133.57,2961.97) v1@4129.02,2968.01 ; 4118,2954.49 cw(c4131.98,2962.57) v1@4122.83,2975.88 ; v1(4120,2652) 4052,2720 v1(3956,2720) 3933.13,2742.87 ; v1(4120,2980) 4129.98,2970.02 U1.130@4129.98,2813.58 ; 4123.41,2945.12 cw(c4138.13,2953.63) v1@4128.5,2967.64 ; U1.51@4129.98,3699.4 4129.98,3638.02 4160,3608 v1(4228,3608) ; C11.1@4208,4680 R12.1@4208,4568 4264,4512 4264,4436 4268,4432 ; R12.1@4212.31,4569.33 cw(c4202.85,4535.43) 4236.85,4544.54 ; BLE102.1@4336,4919.87 BLE102.1@4345.42,4919.87 ; v1@4368,2928 4385.89,2910.11 ; U1.143@4385.89,2813.57 4385.89,2910.11 ; U1.38@4385.89,3699.4 4385.89,3793.89 4417.46,3825.46 C16.2@4417.46,3976 4417.46,4102.52 BLE102.17@4426.94,4112 ; U1.16@4504,3207.28 4656.72,3207.28 v1(4716,3148) v1@4724,3140 ; U1.30@4504,3482.87 4678.87,3482.87 v4(4692,3496) 4685.45,3502.55 U1.31@4504,3502.55 ; C13.2@4768,2830.54 4768,2787 4819,2736 v2(4826,2743) ; R7.2@4977.34,3934.47 BLE102.28@4977.34,4096.52 ; C8.2@5032,1144.39 5099.61,1212 5280,1212 5288,1220 D2.2@5288,1258.87 v2(5402,1372.87) v2@5402,1388 ; SYN.10@2568,3764 SYN.10@2568,3772 2956,4160 3568,4160 3705.46,4022.54 ; 3001.4,1439.6 cw(c2969.04,1407.23) 3014.71,1404.15 ccw(c2969.04,1407.23) 3001.4,1439.6 ; 3001.4,1439.6 ccw(c3022.87,1461.06) 3035.13,1433.29 cw(c3022.87,1461.06) 3001.4,1439.6 ; 3001.4,1439.6 S1.3@3049,1392 ; 3001.4,1462.35 cw(c3051.11,1462.35) 3015.96,1497.5 ccw(c3051.11,1462.35) 3001.4,1462.35 ; 3001.4,1462.35 ccw(c2951.69,1462.35) 2986.84,1497.5 cw(c2951.69,1462.35) 3001.4,1462.35 ; 3049,1180.68 cw(c2990.17,1180.68) 3031.77,1139.07 ccw(c2990.17,1180.68) 3049,1180.68 ; 3049,1180.68 ccw(c3107.83,1180.68) 3066.23,1139.07 cw(c3107.83,1180.68) 3049,1180.68 ; 3049,1204.82 cw(c2966.02,1204.82) 3024.7,1146.15 ccw(c2966.02,1204.82) 3049,1204.82 ; 3049,1204.82 ccw(c3131.98,1204.82) 3073.3,1146.15 cw(c3131.98,1204.82) 3049,1204.82 ; 3049,1299.18 cw(c3131.98,1299.18) S1.3@3073.3,1357.85 ; 3049,1299.18 ccw(c2966.02,1299.18) 3024.7,1357.85 cw(c2966.02,1299.18) 3049,1299.18 ; 3049,1299.18 cw(c3131.98,1299.18) S1.3@3073.3,1357.85 ; 3049,1323.32 cw(c3107.83,1323.32) S1.3@3066.23,1364.93 ; 3049,1323.32 ccw(c2990.17,1323.32) 3031.77,1364.93 cw(c2990.17,1323.32) 3049,1323.32 ; 3049,1323.32 cw(c3107.83,1323.32) S1.3@3066.23,1364.93 ; S1.3@3066.23,1364.93 cw(c3092.97,1338.19) 3092.97,1376 ccw(c3092.97,1338.19) S1.3@3066.23,1364.93 ; S1.3@3073.3,1357.85 cw(c3117.11,1314.05) 3117.11,1376 ccw(c3117.11,1314.05) S1.3@3073.3,1357.85 ; 3175.11,1376 cw(c3175.11,1331.04) 3206.9,1362.83 ccw(c3175.11,1331.04) 3175.11,1376 ; 3175.11,1376 ccw(c3175.11,1420.96) 3206.9,1389.17 cw(c3175.11,1420.96) 3175.11,1376 ; 3232,3363.07 cw(c3196.93,3363.07) 3221.73,3338.27 ccw(c3196.93,3363.07) 3232,3363.07 ; 3232,3363.07 ccw(c3267.07,3363.07) 3242.27,3338.27 cw(c3267.07,3363.07) 3232,3363.07 ; 3232,3368.79 cw(c3291.21,3368.79) 3249.34,3410.66 ccw(c3291.21,3368.79) 3232,3368.79 ; 3232,3368.79 ccw(c3172.79,3368.79) 3214.66,3410.66 cw(c3172.79,3368.79) 3232,3368.79 ; 3232,3387.21 cw(c3172.79,3387.21) 3214.66,3345.34 ccw(c3172.79,3387.21) 3232,3387.21 ; 3232,3387.21 ccw(c3291.21,3387.21) 3249.34,3345.34 cw(c3291.21,3387.21) 3232,3387.21 ; 3232,3392.93 cw(c3267.07,3392.93) 3242.27,3417.73 ccw(c3267.07,3392.93) 3232,3392.93 ; 3232,3392.93 ccw(c3196.93,3392.93) 3221.73,3417.73 cw(c3196.93,3392.93) 3232,3392.93 ; 3705.46,4022.53 cw(c3681.06,4022.53) 3696.3,4003.47 ccw(c3681.06,4022.53) 3705.46,4022.53 ; 3705.46,4022.53 ccw(c3729.87,4022.53) 3714.63,4003.47 cw(c3729.87,4022.53) 3705.46,4022.53 ; 3933.13,2742.87 cw(c3913.79,2723.52) 3941.05,2721.25 ccw(c3913.79,2723.52) 3933.13,2742.87 ; 3933.13,2742.87 ccw(c3952.48,2762.21) 3954.75,2734.95 cw(c3952.48,2762.21) 3933.13,2742.87 ; 3992.21,2720 cw(c3992.21,2756.21) 3966.61,2730.61 ccw(c3992.21,2756.21) 3992.21,2720 ; 3992.21,2720 ccw(c3992.21,2683.79) 3966.61,2709.39 cw(c3992.21,2683.79) 3992.21,2720 ; 4094.39,2677.61 cw(c4068.79,2652) 4105,2652 ccw(c4068.79,2652) 4094.39,2677.61 ; 4094.39,2677.61 ccw(c4120,2703.21) 4120,2667 cw(c4120,2703.21) 4094.39,2677.61 ; 4385.89,2910.11 ccw(c4371.01,2895.23) 4362.25,2914.36 cw(c4371.01,2895.23) 4385.89,2910.11 ; S1.3@3011.73,1429.27 ccw(c3029.19,1446.73) 3039.16,1424.14 cw(c3029.19,1446.73) S1.3@3011.73,1429.27 ; S1.3@3049,1416.21 ccw(c3049,1474.67) 3090.33,1433.33 cw(c3049,1474.67) S1.3@3049,1416.21 ; S1.3@3049,1426.21 ccw(c3049,1508.81) 3107.4,1450.4 cw(c3049,1508.81) S1.3@3049,1426.21 ; S1.3@3049,1436.21 ccw(c3049,1542.95) 3124.48,1467.48 cw(c3049,1542.95) S1.3@3049,1436.21 ; S1.3@3059.16,1392.32 ccw(c3098.56,1431.72) 3098.56,1376 cw(c3098.56,1431.72) S1.3@3059.16,1392.32 ; S1.3@3066.23,1399.39 ccw(c3122.7,1455.86) 3122.7,1376 cw(c3122.7,1455.86) S1.3@3066.23,1399.39 ; S1.3@3073.3,1406.46 ccw(c3146.84,1480) 3146.84,1376 cw(c3146.84,1480) S1.3@3073.3,1406.46 ; S1.3@3073.37,1401.84 cw(c3108.44,1401.84) 3083.64,1426.64 ccw(c3108.44,1401.84) S1.3@3073.37,1401.84 ; S1.3@3083.37,1401.84 cw(c3142.58,1401.84) 3100.71,1443.71 ccw(c3142.58,1401.84) S1.3@3083.37,1401.84 ; v1@4109.39,2969.39 cw(c4059.68,2919.68) 4129.98,2919.68 ccw(c4059.68,2919.68) v1@4109.39,2969.39 ; v1@4116.46,2976.46 cw(c4083.83,2943.83) 4129.98,2943.83 ccw(c4083.83,2943.83) v1@4116.46,2976.46 ; v1@4358.08,2923.45 cw(c4364.62,2909.18) 4375.72,2920.28 ccw(c4364.62,2909.18) v1@4358.08,2923.45
  Top Layer w20: v2(2110,1514) 2240,1384 R23.1@2258.6,1384 ; J1.6@2273.39,2535.95 2493.95,2535.95 v2(2504,2546) ; USB.5@4013.98,1360 4013.98,1266.02 4072,1208 4248,1208 4360,1096 4609,1096 AMS117.1@4689,1176 4865,1176 C9.1@4870,1171 5005.39,1171 C8.2@5032,1144.39 ; 4260,4424 4264.13,4419.87 BLE102.11@4336,4419.87 ; BLE102.1@4345.42,4919.87 BLE102.1@4360.13,4919.87 ; BLE102.17@4426.94,4112 4426.94,4170.94 4468,4212 4468,4328 4426.13,4369.87 ; C7.1@4864,1360 C6.1@5024,1360 5132,1360 5296,1524 3V.9@5296,1660 3V.7@5196,1660 3V.5@5096,1660 3V.3@4996,1660 3V.1@4896,1660 ; 5V.1@4892,1892 5V.3@4992,1892 5V.5@5092,1892 5V.7@5192,1892 5V.9@5292,1892 ; 5V.1@4900,1876 5V.9@5300,1876 ; BLE102.28@4982.61,4096.52 4982.61,4217.39 4830.13,4369.87 4426.13,4369.87 ; 4984,3941.13 4984,4112 5011.2,4112 BLE102.29@5069.07,4169.87 5138,4169.87 ; C1.1@5073,3249 5073,3368 C2.1@5072,3369 5175,3369 ; C3.2@5135.85,2707.95 ccw(c5110.36,2726.47) 5137.65,2742.22 ; C3.2@5146.87,2696 5130.87,2712 C4.2@5130.87,2920 5392,2920 5408,2936 5408,3208 5247,3369 5175,3369 ; BLE102.1@4360.13,4919.87 4460,4820 4460,4493.87 4380.54,4414.42 4336,4414.42 BLE102.12@4336,4369.87 4426.13,4369.87 ; BLE102.1@4360.13,4919.87 BLE102.44@5069.07,4919.87 5098.13,4919.87 5178,4840 5178,4209.87 5138,4169.87 ; 4747.48,1176 cw(c4747.48,1208.89) 4724.22,1185.63 ccw(c4747.48,1208.89) 4747.48,1176 ; 4747.48,1176 ccw(c4747.48,1143.11) 4724.22,1166.37 cw(c4747.48,1143.11) 4747.48,1176 ; 4906.82,1171 cw(c4906.82,1203.89) 4883.57,1180.63 ccw(c4906.82,1203.89) 4906.82,1171 ; 4906.82,1171 ccw(c4906.82,1138.11) 4883.57,1161.37 cw(c4906.82,1138.11) 4906.82,1171 ; 5138,4169.87 5374.13,4169.87 5462,4082 5462,3656 5175,3369 ; 4622.06,1109.06 ccw(c4555.12,1176) 4649.79,1176 cw(c4555.12,1176) 4622.06,1109.06 ; 4656.2,1143.2 ccw(c4623.4,1176) 4669.79,1176 cw(c4623.4,1176) 4656.2,1143.2 ; 4821.11,1176 cw(c4821.11,1126.04) 4856.43,1161.37 ccw(c4821.11,1126.04) 4821.11,1176 ; C3.2@5130.87,2723.17 ccw(c5170.1,2723.17) 5142.36,2695.43 cw(c5170.1,2723.17) C3.2@5130.87,2723.17
  Bottom Layer w10: 2020,3756 2020,3740 PB0.2@2044,3716 ; C12.1@2120,1984 2222,1984 v2(2397,1809) ; PB0.1@2144,3716 2148,3720 2148,3772 ; WIFI.2@2538.64,3085.1 cw(c2576.3,3077.39) 2566.35,3114.52 ; WIFI.2@2544,3084 2676,3216 3120,3216 P8.1@3232,3328 ; WIFI.2@2545.1,3078.64 ccw(c2537.39,3116.3) 2574.52,3106.35 ; SYN.10@2568,3772 SYN.9@2568,3872 ; v1(2640,3560) 2643,3560 2707,3496 3164,3496 P8.2@3232,3428 3412,3428 v1(3428,3444) ; 3201.48,3305.65 cw(c3238.61,3295.7) P8.1@3230.9,3333.36 ; 3201.48,3450.35 ccw(c3238.61,3460.3) P8.2@3230.9,3422.64 ; 3209.65,3297.48 ccw(c3199.7,3334.61) P8.1@3237.36,3326.9 ; JTAG.4@3535,1851 JTAG.6@3635,1851 ; JTAG.14@4035,1851 JTAG.16@4135,1851 JTAG.18@4235,1851 JTAG.20@4335,1851 ; v1(4120,2980) 4172,2928 v1(4356,2928) ; 2568,3807.07 cw(c2532.93,3807.07) 2557.73,3782.27 ccw(c2532.93,3807.07) 2568,3807.07 ; 2568,3807.07 ccw(c2603.07,3807.07) 2578.27,3782.27 cw(c2603.07,3807.07) 2568,3807.07 ; 2568,3812.79 cw(c2627.21,3812.79) 2585.34,3854.66 ccw(c2627.21,3812.79) 2568,3812.79 ; 2568,3812.79 ccw(c2508.79,3812.79) 2550.66,3854.66 cw(c2508.79,3812.79) 2568,3812.79 ; 2568,3831.21 cw(c2508.79,3831.21) 2550.66,3789.34 ccw(c2508.79,3831.21) 2568,3831.21 ; 2568,3831.21 ccw(c2627.21,3831.21) 2585.34,3789.34 cw(c2627.21,3831.21) 2568,3831.21 ; 2568,3836.93 cw(c2603.07,3836.93) 2578.27,3861.73 ccw(c2603.07,3836.93) 2568,3836.93 ; 2568,3836.93 ccw(c2532.93,3836.93) 2557.73,3861.73 cw(c2532.93,3836.93) 2568,3836.93 ; 2568.8,3108.8 cw(c2544,3133.6) 2544,3098.53 ccw(c2544,3133.6) 2568.8,3108.8 ; 2568.8,3108.8 ccw(c2593.6,3084) 2558.53,3084 cw(c2593.6,3084) 2568.8,3108.8 ; 2585.87,3125.87 cw(c2544,3167.74) 2544,3108.53 ccw(c2544,3167.74) 2585.87,3125.87 ; 2585.87,3125.87 ccw(c2627.74,3084) 2568.53,3084 cw(c2627.74,3084) 2585.87,3125.87 ; 3190.13,3286.13 cw(c3232,3244.26) 3232,3303.47 ccw(c3232,3244.26) 3190.13,3286.13 ; 3190.13,3286.13 ccw(c3148.26,3328) 3207.47,3328 cw(c3148.26,3328) 3190.13,3286.13 ; P8.1@3207.2,3303.2 cw(c3232,3278.4) 3232,3313.47 ccw(c3232,3278.4) P8.1@3207.2,3303.2 ; P8.1@3207.2,3303.2 ccw(c3182.4,3328) 3217.47,3328 cw(c3182.4,3328) P8.1@3207.2,3303.2 ; 4145.61,2954.39 cw(c4171.21,2980) 4135,2980 ccw(c4171.21,2980) 4145.61,2954.39 ; 4145.61,2954.39 ccw(c4120,2928.79) 4120,2965 cw(c4120,2928.79) 4145.61,2954.39 ; 4319.79,2928 cw(c4319.79,2891.79) 4345.39,2917.39 ccw(c4319.79,2891.79) 4319.79,2928 ; 4319.79,2928 ccw(c4319.79,2964.21) 4345.39,2938.61 cw(c4319.79,2964.21) 4319.79,2928
  Bottom Layer w20: JTAG.20@4335,1851 4350,1836 LCD-G.2@4589,1836
  other v2: 2000,1264 2492,1809 2598,1809 2180,2856 1900,3308 2120,4168 1852,4580
  other v4: 3984,3784
KEY1: R24.1 U1.4 | length 4405.2
  Top Layer w8: R24.1@2525.4,1536 2665.4,1676 v2(2694,1676) v2@2703,1676 ; U1.4@4504,2971.06 4618.94,2971.06 4673,2917 4673,2810 5033,2450 5033,2223 v2(4966,2156)
  Bottom Layer w8: v2(2694,1676) 3174,1676 3448.53,1401.47 4769.94,1401.47 4952.47,1584 4952.47,2142.47 v2(4966,2156) v2@4951,2156
LCD5_V: LCD.29 P?.1 | length 279.9
  Top Layer w25: LCD.29@4656,2248 4656,2321 4774,2439 P?.1@4814,2439
LCDG: LCD-G.1 LCD.30 | length 239.8
  Bottom Layer w15: LCD-G.1@4589,1936 4589,2081 LCD.30@4656,2148
NetB0_1: B0.1 P6.1 | length 371.8
  Top Layer w10: P6.1@3086.66,3310.66 cw(c3044.79,3268.79) 3104,3268.79 cw(c3163.21,3268.79) P6.1@3121.34,3310.66 ; P6.1@3093.73,3317.73 cw(c3068.93,3292.93) 3104,3292.93 cw(c3139.07,3292.93) P6.1@3114.27,3317.73 ; B0.1@3098.83,3233.1 ccw(c3086.36,3245.58) 3104,3245.58 ; 3104,3260.07 ccw(c3152.13,3260.07) B0.1@3118.1,3226.03 ; 3104,3284.21 ccw(c3176.27,3284.21) B0.1@3125.17,3233.1 ; P6.1@3104,3328 3104,3224 B0.1@3112,3216
NetB1_1: B1.1 P6.2 | length 394
  Top Layer w10: B1.1@3082.83,3558.9 cw(c3051.04,3527.11) 3096,3527.11 cw(c3140.96,3527.11) B1.1@3109.17,3558.9 ; P6.2@3086.66,3445.34 ccw(c3064.1,3467.9) 3096,3467.9 ; 3096,3458.24 ccw(c3134.24,3458.24) P6.2@3107.2,3431.2 ; 3096,3482.39 ccw(c3158.39,3482.39) P6.2@3114.27,3438.27 ; 3096,3506.53 ccw(c3182.53,3506.53) P6.2@3121.34,3445.34 ; B1.1@3096,3576 3096,3436 P6.2@3104,3428
NetBLE102_19: BLE102.19 P4.2 | length 1317.9
  Top Layer w10: BLE102.19@4517.95,4093.17 cw(c4496.24,4071.46) 4526.94,4071.46 cw(c4557.64,4071.46) BLE102.19@4535.94,4093.17 ; BLE102.19@4526.94,4112 4526.94,3913.06 4656,3784 4952,3784 5184,4016 P4.2@5300,4016 ; P4.2@5282.66,3998.66 ccw(c5240.79,3956.79) 5240.79,4016 ccw(c5240.79,4075.21) P4.2@5282.66,4033.34 ; P4.2@5289.73,4005.73 ccw(c5264.93,3980.93) 5264.93,4016 ccw(c5264.93,4051.07) P4.2@5289.73,4026.27
NetBLE102_20: BLE102.20 P4.1 | length 1356.9
  Top Layer w10: BLE102.20@4567.95,4093.17 cw(c4546.24,4071.46) 4576.94,4071.46 cw(c4607.64,4071.46) BLE102.20@4585.94,4093.17 ; BLE102.20@4576.94,4112 4576.94,3943.06 4664,3856 4976,3856 5216,4096 5320,4096 P4.1@5400,4016 ; P4.1@5375.47,4016 ccw(c5316.26,4016) 5358.13,4057.87 ccw(c5400,4099.74) P4.1@5400,4040.53 ; P4.1@5385.47,4016 ccw(c5350.4,4016) 5375.2,4040.8 ccw(c5400,4065.6) P4.1@5400,4030.53
NetBLE102_23: BLE102.23 D1.1 | length 362.1
  Top Layer w10: D1.1@4680,3912 4726.94,3958.94 BLE102.23@4726.94,4112 ; D1.1@4680,3924.56 ccw(c4680,3954.88) D1.1@4701.44,3933.44 ; D1.1@4680,3934.56 ccw(c4680,3989.02) 4718.51,3950.51 ; D1.1@4698.62,3915.94 cw(c4734.07,3915.94) 4709.01,3941.01 ; BLE102.23@4717.95,4093.17 cw(c4696.24,4071.46) 4726.94,4071.46 cw(c4757.64,4071.46) BLE102.23@4735.94,4093.17
NetBR0_1: BR0.1 SYN2.4 | length 250.5
  Bottom Layer w8: BR0.1@1904,3754.6 1904,3736 SYN2.4@2068,3572
NetBR0_2: BR0.2 PBD.2 | length 149.4
  Bottom Layer w15: BR0.2@1904,3829.4 1926.6,3852 PBD.2@2044,3852
NetBR1_1: BR1.1 SYN2.3 | length 203.3
  Bottom Layer w8: SYN2.3@2168,3572 2168,3622.6 BR1.1@2276,3730.6
NetBR1_2: BR1.2 PBD.1 | length 151.3
  Bottom Layer w15: PBD.1@2144,3852 2229.4,3852 BR1.2@2276,3805.4
NetC15_1: C15.1 key1.1 key1.4 R23.2 R24.2 | length 1948.1
  Top Layer w8: C15.1@2300.73,1085.27 cw(c2331.46,1054.54) 2331.46,1098 cw(c2331.46,1141.46) C15.1@2300.73,1110.73 ; C15.1@2306.38,1079.62 cw(c2350.77,1035.23) 2350.77,1098 cw(c2350.77,1160.77) C15.1@2306.38,1116.38 ; key1.4@2409.99,1345.15 cw(c2349.61,1284.77) 2435,1284.77 cw(c2520.39,1284.77) key1.4@2460.01,1345.15 ; key1.4@2409.99,1414.85 ccw(c2349.61,1475.23) 2435,1475.23 ccw(c2520.39,1475.23) key1.4@2460.01,1414.85 ; key1.4@2415.65,1350.8 cw(c2368.92,1304.08) 2435,1304.08 cw(c2501.08,1304.08) key1.4@2454.35,1350.8 ; key1.4@2415.65,1409.2 ccw(c2368.92,1455.92) 2435,1455.92 ccw(c2501.08,1455.92) key1.4@2454.35,1409.2 ; key1.4@2421.3,1356.46 cw(c2388.24,1323.39) 2435,1323.39 cw(c2481.76,1323.39) key1.4@2448.7,1356.46 ; key1.4@2421.3,1403.54 ccw(c2388.24,1436.61) 2435,1436.61 ccw(c2481.76,1436.61) key1.4@2448.7,1403.54 ; key1.4@2435,1380 2435,1531 R24.2@2440,1536 ; 2435,1442.28 cw(c2540.38,1442.28) R24.2@2465.86,1516.8 ; 2435,1461.6 cw(c2521.07,1461.6) R24.2@2460.21,1522.45 ; 2435,1480.91 cw(c2501.75,1480.91) R24.2@2454.55,1528.11 ; 2435,1500.22 cw(c2482.44,1500.22) 2448.89,1533.77 2450.6,1533.77 R24.2@2450.6,1536
  Top Layer w10: R23.2@2318.84,1402.5 ccw(c2283.69,1437.65) 2333.4,1437.65 ccw(c2383.11,1437.65) R23.2@2347.96,1402.5 ; R23.2@2333.4,1384 2333.4,1453.4 2416,1536 ; R24.2@2432.5,1526.18 ccw(c2416,1517.23) 2416,1536 ; R24.2@2432.5,1545.82 cw(c2416,1554.77) 2416,1536 ; R24.2@2440,1536 2416,1536
  Top Layer w15: C15.1@2288,1098 2433,1098 key1.1@2435,1100 key1.4@2435,1380
NetD1_2: D1.2 R7.1 | length 234.4
  Top Layer w10: D1.2@4770.87,3912 R7.1@4864,3912 ; D1.2@4784.03,3898.83 cw(c4815.82,3867.04) 4815.82,3912 cw(c4815.82,3956.96) D1.2@4784.03,3925.17 ; R7.1@4850.83,3898.83 ccw(c4819.04,3867.04) 4819.04,3912 ccw(c4819.04,3956.96) R7.1@4850.83,3925.17
NetD2_1: D2.1 R13.2 | length 335.8
  Top Layer w8: R13.2@5176,1165.13 5285.13,1165.13 D2.1@5288,1168 ; R13.2@5188.15,1156.92 cw(c5207.99,1137.08) 5207.99,1165.13 cw(c5207.99,1193.19) R13.2@5188.15,1173.35 ; R13.2@5193.81,1151.26 cw(c5227.31,1117.76) 5227.31,1165.13 cw(c5227.31,1212.51) R13.2@5193.81,1179.01 ; 5229.77,1165.13 ccw(c5229.77,1222.29) D2.1@5270.19,1181.87 ; 5243.61,1165.13 cw(c5243.61,1127.55) D2.1@5270.19,1154.13 ; 5249.09,1165.13 ccw(c5249.09,1202.98) D2.1@5275.85,1176.22
NetD3_1: D3.1 R14.2 | length 330.1
  Top Layer w8: R14.2@3210.13,1205.87 ccw(c3176.63,1239.37) 3224,1239.37 ccw(c3271.37,1239.37) R14.2@3237.87,1205.87 ; D3.1@3210.13,1271.26 cw(c3176.63,1237.76) 3224,1237.76 cw(c3271.37,1237.76) D3.1@3237.87,1271.26 ; R14.2@3215.78,1200.22 ccw(c3195.94,1220.06) 3224,1220.06 ccw(c3252.06,1220.06) R14.2@3232.22,1200.22 ; D3.1@3215.78,1276.92 cw(c3195.94,1257.08) 3224,1257.08 cw(c3252.06,1257.08) D3.1@3232.22,1276.92 ; R14.2@3224,1192 D3.1@3224,1285.13
NetR12_2: R12.2 S3.2 | length 678
  Top Layer w8: S3.2@3960,4304.41 4035.28,4304.41 R12.2@4208,4477.13 ; S3.2@3974.91,4292.05 cw(c4001.22,4270.23) 4001.22,4304.41 cw(c4001.22,4338.59) S3.2@3974.91,4316.77 ; S3.2@3981.07,4286.94 cw(c4018.25,4256.12) 4018.25,4304.41 cw(c4018.25,4352.7) S3.2@3981.07,4321.88 ; S3.2@3987.23,4281.83 cw(c4035.27,4242) 4035.27,4304.41 cw(c4035.27,4366.82) S3.2@3987.23,4326.99 ; 4167.78,4436.92 ccw(c4127.56,4477.13) R12.2@4184.44,4477.13 ; 4177.29,4446.42 cw(c4204.06,4419.65) R12.2@4204.06,4457.51 ; 4181.44,4450.57 ccw(c4154.88,4477.13) R12.2@4192.44,4477.13